# Altium PCB carDoor.PcbDoc
Units mm, origin at the board's own origin, x right, y up, seen from the top; angles counter-clockwise.
Board outline 60 x 40 mm, 2 copper layers (Top Layer, Bottom Layer); 49 components, 30 nets, 140 pads, 62 vias.
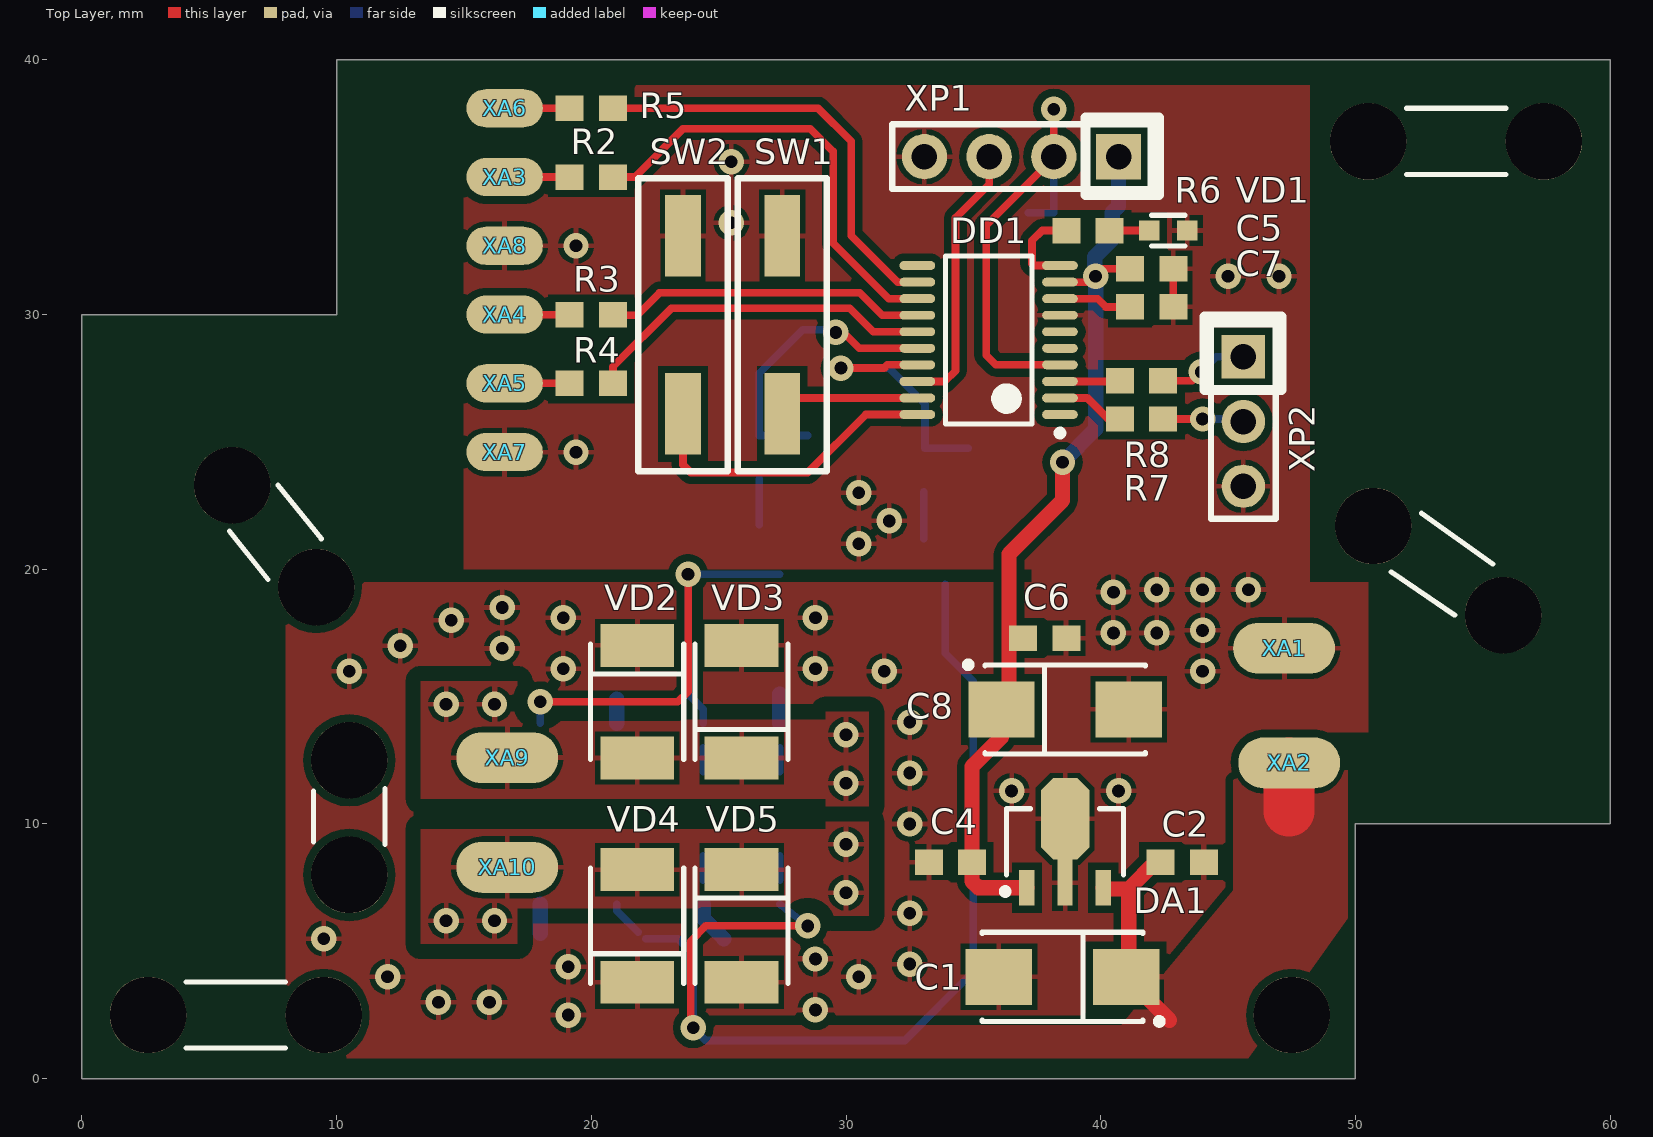
[diagram p0: Top Layer view]
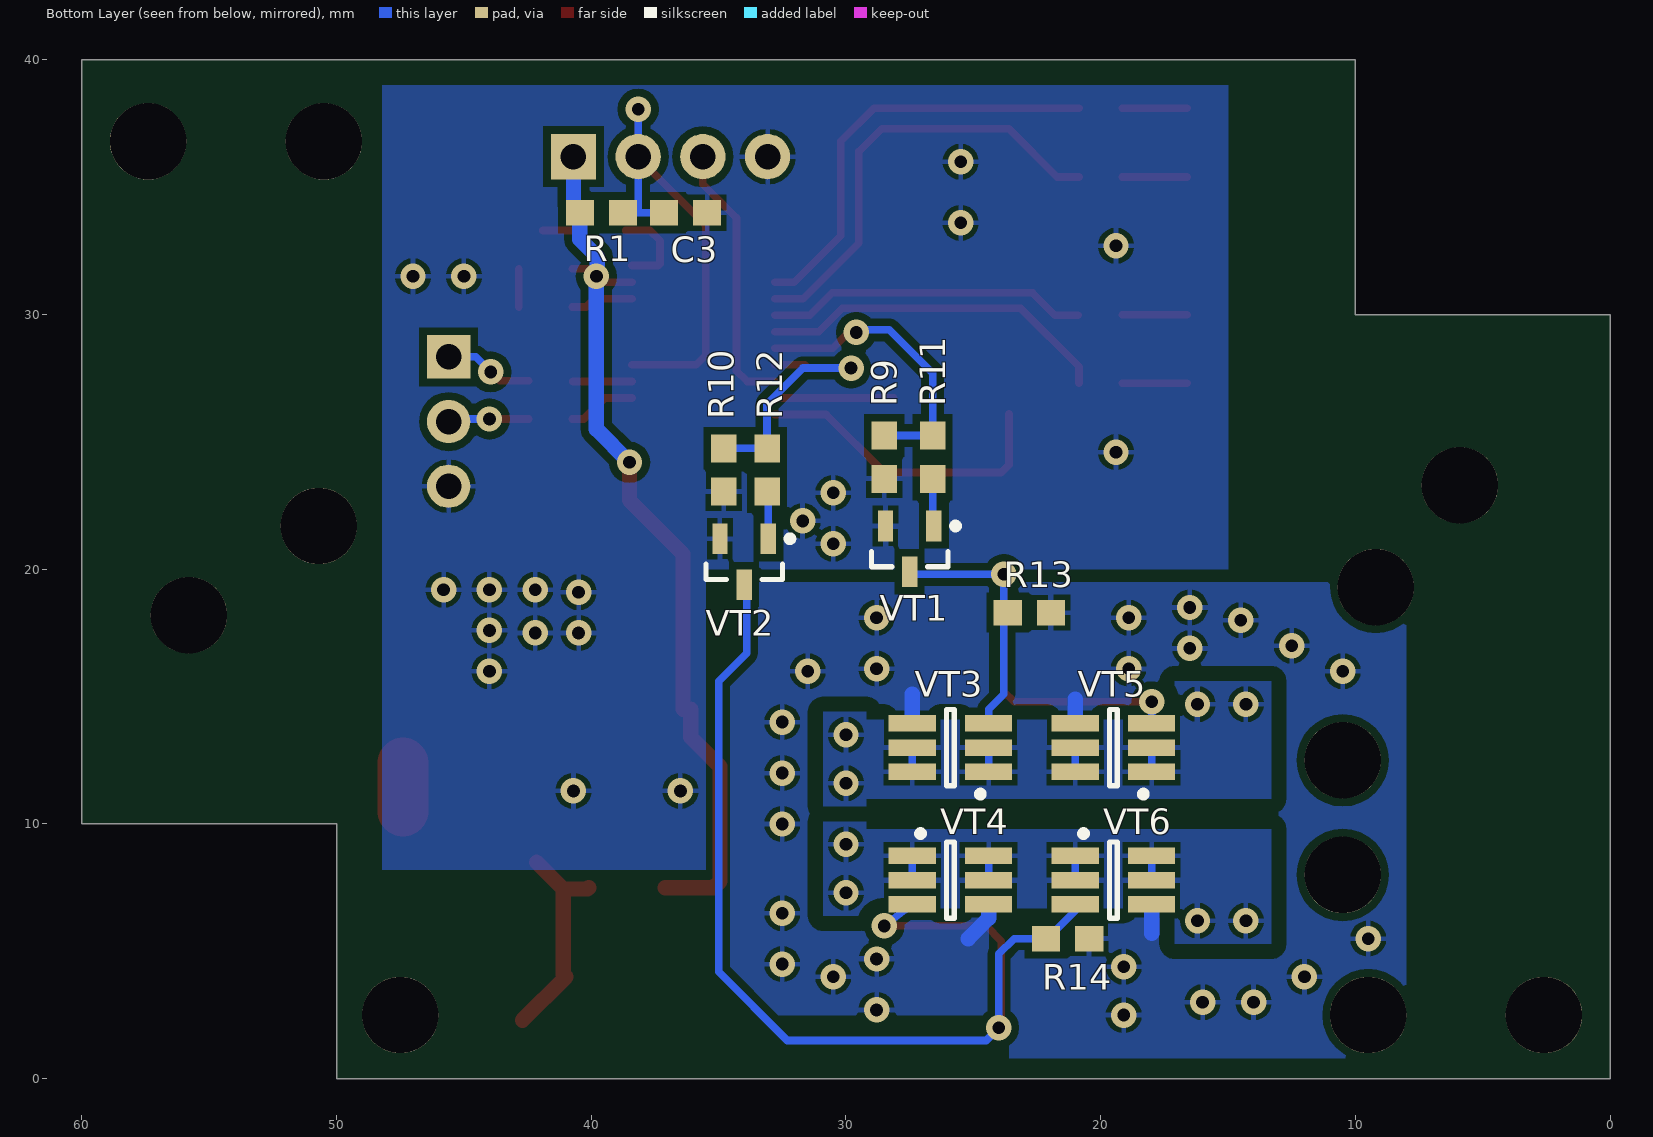
[diagram p1: Bottom Layer view, seen from below]
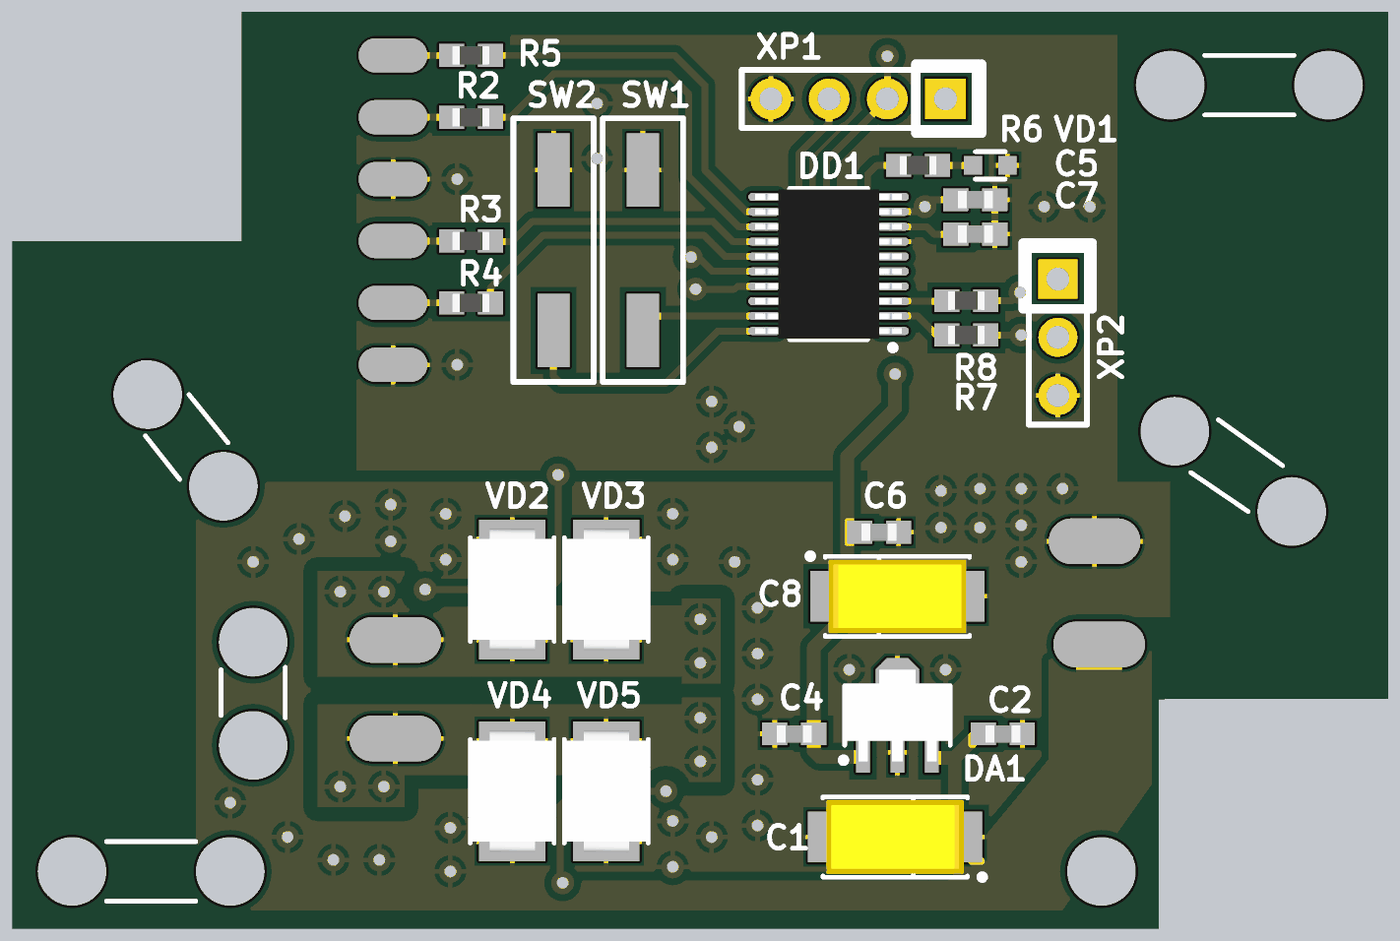
[diagram p2: 3D render of the assembled board from above, using the file's embedded part models]
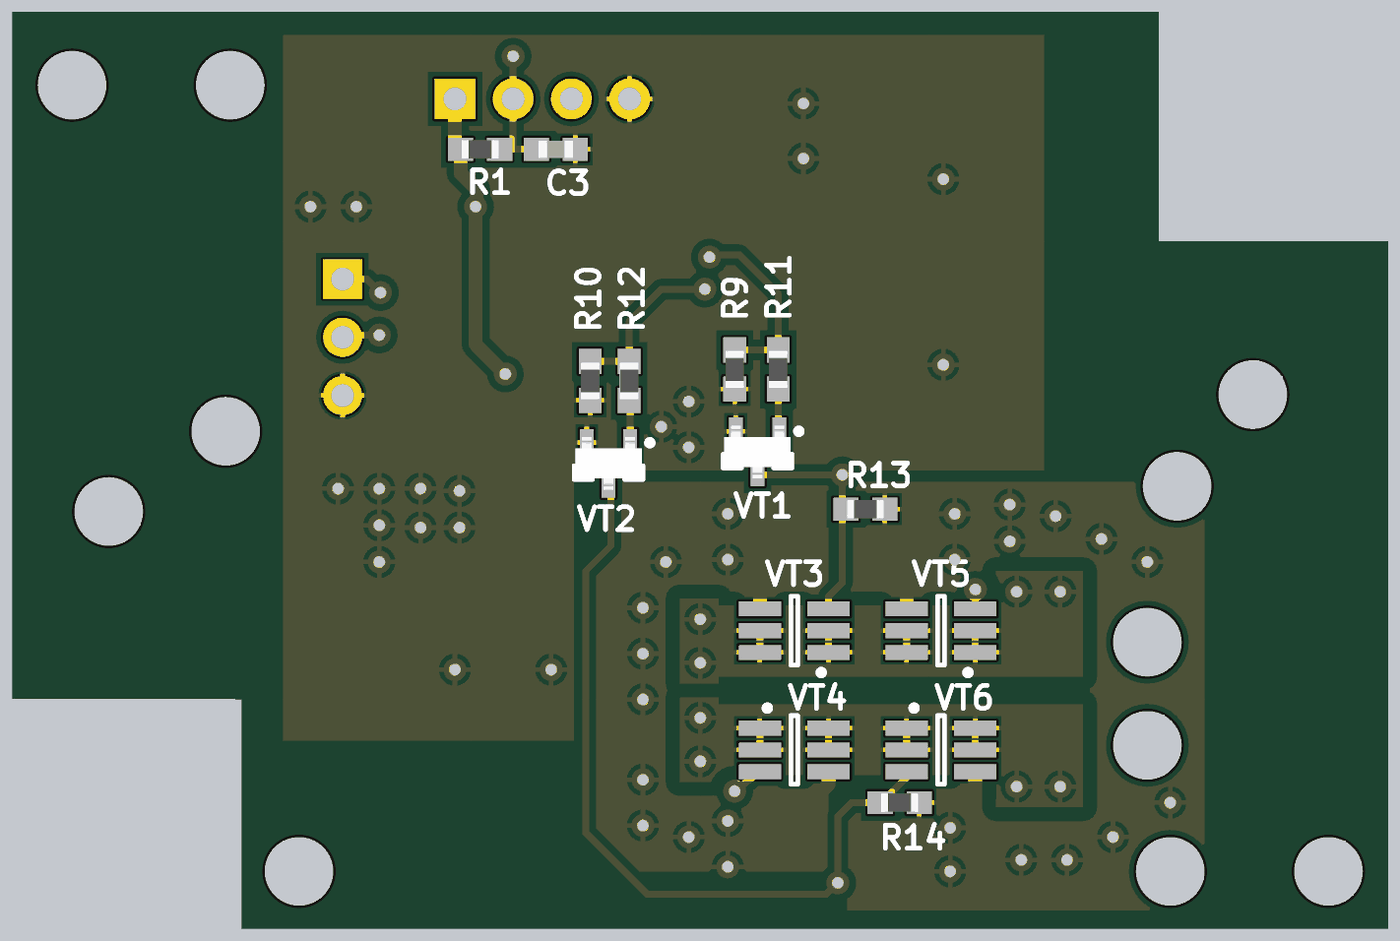
[diagram p3: 3D render of the assembled board from below, using the file's embedded part models]

## Layer stack, top to bottom
Top Solder: solder mask 0.0102, Solder Resist, Dk 3.5
Top Layer: signal copper 0.0356
Dielectric1: dielectric 0.32, FR-4, Dk 4.8
Bottom Layer: signal copper 0.0356
Bottom Solder: solder mask 0.0102, Solder Resist, Dk 3.5

## Board outline
0,0 0,30 10,30 10,40 60,40 60,10 50,10 50,0

## Design rules (kind name [scope] priority, off if disabled: settings)
Clearance Clearance_Motor [(InNet('MOTORA') OR InNet('MOTORB'))] p1: gap=0.6 except(0.2: Track-SMDPad SMDPad-SMDPad SMDPad-Via SMDPad-Fill SMDPad-Poly; 0.5: Track-Track)
Clearance [All] p2: gap=0.3
HoleSize [All] p1: absolutevalues=TRUE maxlimit=25.54 minlimit=0.025 maxpercent=80.000 minpercent=20.000
PlaneConnect [All] p1: planeconnectstyle=Direct reliefexpansion=0.508 reliefentries=4 reliefconductorwidth=0.254 reliefairgap=0.254
PolygonConnect PolygonConnect_to_Via [All] p1: connectstyle=Relief reliefconductorwidth=0.2 reliefentries=4 polygonreliefangle="90 Angle" airgapwidth=0.2
RoutingVias [All] p1: holewidth=0.5 width=1 viastyle="Through Hole" minholewidth=0.4 minwidth=0.9 maxholewidth=5 maxwidth=5
SolderMaskExpansion [All] p1: expansion=0.102
Width [All] p1: maxlimit=4 minlimit=0.3 preferedwidth=0.3
28 further rules are at their usual default settings.

## Components (designator, comment, footprint, x,y, rotation, side; value= is the part's Value field where it differs from the comment)
C1 "10uFx25V" C-CASE 38.5,4 r180 top
C2 "0.1uF" C-1608[0603] 43.2,8.5 r0 top
C3 "0.1uF" C-1608[0603] 36.3,34 r180 bottom
C4 "0.1uF" C-1608[0603] 34.1,8.5 r180 top
C5 "0.1uF" C-1608[0603] 42,31.8 r0 top
C6 "0.1uF" C-1608[0603] 37.8,17.3 r0 top
C7 "1uF" C-1608[0603] 42,30.3 r0 top
C8 "47uFx6V" C-CASE 38.6,14.5 r0 top
DA1 "L78L05ABU" SOT89 38.6,9.3 r90 top
DD1 "STM8S103F3" TSSOP20 35.6,29 r180 top
R1 "10K" R-1608[0603] 39.6,34 r0 bottom
R2 "100" R-1608[0603] 20,35.4 r0 top
R3 "100" R-1608[0603] 20,30 r0 top
R4 "100" R-1608[0603] 20,27.3 r0 top
R5 "100" R-1608[0603] 20,38.1 r0 top
R6 "1K" R-1608[0603] 39.5,33.3 r180 top
R7 "100" R-1608[0603] 41.6,25.9 r180 top
R8 "100" R-1608[0603] 41.6,27.4 r180 top
R9 "10K" R-1608[0603] 28.5,24.4 r270 bottom
R10 "10K" R-1608[0603] 34.8,23.9 r270 bottom
R11 "1K" R-1608[0603] 26.6,24.4 r270 bottom
R12 "1K" R-1608[0603] 33.1,23.9 r270 bottom
R13 "1K" R-1608[0603] 22.8,18.3 r180 bottom
R14 "1K" R-1608[0603] 21.3,5.5 r180 bottom
SW1 "DTSM-32(SWT-10)" DTSM-32(SWT-10) 27.5,29.6 r270 top
SW2 "DTSM-32(SWT-10)" DTSM-32(SWT-10) 23.6,29.6 r270 top
VD1 "GreenLed 0603" LED-0603 43.4,33.3 r180 top
VD2 "SS14" SMB 21.8,14.8 r270 top
VD3 "SS14" SMB 25.9,14.8 r90 top
VD4 "SS14" SMB 21.8,6 r90 top
VD5 "SS14" SMB 25.9,6 r270 top
VT1 "BC817" SOT-23 27.5,20.8 r270 bottom
VT2 "BC817" SOT-23 34,20.3 r270 bottom
VT3 "IRFTS8342" Micro6 25.9,13 r0 bottom
VT4 "IRFTS8342" Micro6 25.9,7.8 r180 bottom
VT5 "IRFTS9342" Micro6 19.5,13 r0 bottom
VT6 "IRFTS9342" Micro6 19.5,7.8 r180 bottom
XA1 "*" TPad-4x2mm 47.2,16.9 r0 top
XA2 "*" TPad-4x2mm 47.4,12.4 r0 top
XA3 "*" TPad-3x1.5mm 16.6,35.4 r0 top
XA4 "*" TPad-3x1.5mm 16.6,30 r180 top
XA5 "*" TPad-3x1.5mm 16.6,27.3 r180 top
XA6 "*" TPad-3x1.5mm 16.6,38.1 r180 top
XA7 "*" TPad-3x1.5mm 16.6,24.6 r180 top
XA8 "*" TPad-3x1.5mm 16.6,32.7 r180 top
XA9 "*" TPad-4x2mm 16.7,12.6 r180 top
XA10 "*" TPad-4x2mm 16.7,8.3 r180 top
XP1 "PLS-4" PLS4 40.7,36.2 r180 top
XP2 "PLS-3" PLS3 45.6,28.34 r270 top

## Footprints (in the part's own frame and the unit in brackets; to place one, negate y for a bottom-side part, rotate by r counter-clockwise, add the part's x,y. Pads: shape width x height; smd on the part's side, far side on the other; paste and mask are expansions set on the pad)
C-1608[0603] [mm]
  rect 1.1x1 smd: 1(-0.85,0) 2(0.85,0)
  body extent -0.76,-0.38 0.76,0.38, height 0.5
C-CASE [mm]
  rect 2.6x2.2 smd: 1(-2.5,0) 2(2.5,0)
  silkscreen extent -3.92,-1.75 3.15,1.87, body extent -3,-1.6 3,1.6, height 2.51
DTSM-32(SWT-10) [mm]
  rect 3.2x1.4 smd: 1(-3.5,0) 2(3.5,0)
  silkscreen extent -5.75,-1.75 5.75,1.75, body extent -4.25,-1.65 4.5,1.65, height 5
LED-0603 [mm]
  rect 0.8x0.8 smd: 1(0,0) 2(1.5,0)
  silkscreen extent 0.1,-0.6 1.4,0.6
Micro6 [mm] "IRLMS1503 footprint"
  rect 1.85x0.65 smd: 1(-1.5,0.95) 2(-1.5,0) 3(-1.5,-0.95) 4(1.5,-0.95) 5(1.5,0) 6(1.5,0.95)
  silkscreen extent -1.3,-1.5 0.15,1.95, body extent -0.87,-1.5 0.88,1.5, height 1.45
PLS3 [mm]
  rect 1.7x1.7 hole 1: 1(0,0)
  round 1.7 hole 1: 2(2.54,0) 3(5.08,0)
  silkscreen extent -1.58,-1.53 6.35,1.5, body extent -1.27,-1.3 6.3,1.3, height 8.54
PLS4 [mil]
  rect 70x70 hole 39.37: 1(0,0)
  round 70 hole 39.37: 2(100,0) 3(200,0) 4(300,0)
  silkscreen extent -62,-60 350,59, body extent -50,-50 350,50, height 336
R-1608[0603] [mm]
  rect 1.1x1 smd: 1(-0.85,0) 2(0.85,0)
  body extent -0.8,-0.4 0.8,0.4, height 0.37
SMB [mil] "http://www.vishay.com/docs/95017/smb.pdf"
  rect 66x114 smd mask+4: 1(-87,0) 2(87,0)
  silkscreen extent -89,-72 89,72, body extent -104,-70 104,70, height 85
SOT89 [mm] "SOT89, 3-Leads, Body 4.5x2.4 mm, Pitch 1.5mm, Lead Span 4.1mm, IPC Medium Density"
  rect 1.4x0.6 smd: 1(-1.8,1.5) 3(-1.8,-1.5)
  rect 1.8x0.6 smd: 2(-1.6,0)
  oct 3.2x1.9 smd: 2(0.9,0)
  silkscreen extent -2.07,-2.3 1.3,2.47, body extent -2,-2.25 2,2.25, height 1.55
SOT-23 [mm] "SOT23, 3-Leads, Body 2.9x1.3mm, Pitch 0.95mm, Lead Span 2.5mm, IPC High Density"
  rect 1.2x0.6 smd: 1(-0.9,0.95) 2(-0.9,-0.95) 3(0.9,0)
  silkscreen extent -1.02,-1.5 0.7,1.92, body extent -1.15,-1.45 1.15,1.45, height 1
TPad-3x1.5mm [mm] "Pad-3x1.5mm"
  oval 3x1.5 smd: 0(0,0)
TPad-4x2mm [mm] "Pad-4x2mm"
  oval 4x2 smd: 0(0,0)
TSSOP20 [mm] "TSOP, 20-Leads, Body 6.5x4.4mm, Pitch 0.65mm, IPC High Density"
  oval 1.4x0.35 smd: 1(-2.8,2.925) 2(-2.8,2.275) 3(-2.8,1.625) 4(-2.8,0.975) 5(-2.8,0.325) 6(-2.8,-0.325) 7(-2.8,-0.975) 8(-2.8,-1.625) 9(-2.8,-2.275) 10(-2.8,-2.925) 11(2.8,-2.925) 12(2.8,-2.275) 13(2.8,-1.625) 14(2.8,-0.975) 15(2.8,-0.325) 16(2.8,0.325) 17(2.8,0.975) 18(2.8,1.625) 19(2.8,2.275) 20(2.8,2.925)
  silkscreen extent -2.93,-3.3 1.7,3.77, body extent -3.2,-3.25 3.2,3.25, height 0.97

## Part data
C1 C8: library part C-CCASE, "C-CCASE"
C2 C3 C4 C5 C6 C7: library part C-0603, "C-0603"
DD1: library part "STM8S103Fx TSSOP20, SO20", "STM8 8-bit microcontroller"
R1 R2 R3 R4 R5 R6 R7 R8 R9 R10 R11 R12 R13 R14: library part R-0603, "R-0603"
VD1: library part L-C191KGCT, "0603 Green Led"
VD2 VD3 VD4 VD5: library part MBRS140T3G, "Surface Mount Schottky Power Rectifier"
VT3 VT4: "HEXFET Power Mosfet N channel"
VT5 VT6: "HEXFET Power MOSFET P channel"
XA1 XA2 XA3 XA4 XA5 XA6 XA7 XA8 XA9 XA10: library part "TPad without via", "pad for soldering"

## Free pads (board coordinates)
  round 3 hole 3 unplated: 0(2.6,2.5) 0(5.9,23.3) 0(9.2,19.3) 0(9.5,2.5) 0(10.5,8) 0(10.5,12.5) 0(47.5,2.5) 0(50.5,36.8) 0(50.7,21.7) 0(55.8,18.2) 0(57.4,36.8)

## Via types
v1: diameter 1, hole 0.5, Top Layer to Bottom Layer, tented both sides, 62 vias

## Nets (pads, with @x,y where several pads share a name; then routed paths per layer and width w, separated by ;. In a path a pad name is that pad's centre, name@x,y a point inside that pad or via, vN(x,y) a via of type N, cw(c..) or ccw(c..) an arc to the next point about the centre after c; other vN are vias at no path point)
+5V: C4.1 C5.1 C6.1 C8.1 DA1.1 DD1.9 R1.2 XP1.1 | length 35.3
  Top Layer w0.3: DD1.9 39.475,31.275 39.7,31.5 v1(39.8,31.5) ; v1@40,31.8 C5.1@40.75,31.8
  Top Layer w0.6: C8.1 36.1,13.411 34.95,12.261 C4.1 34.95,7.75 35.2,7.5 DA1.1 ; C8.1@36.4,14.5 36.4,20.6 38.5,22.7 v1(38.5,24.2)
  Bottom Layer w0.6: v1(38.5,24.2) 39.8,25.5 v1(39.8,31.5) ; v1@39.765,31.465 39.765,32.265 40.45,32.95 R1.2 40.7,34.25 XP1.1
+12V: C1.1 C2.1 DA1.3 R13.2 R14.2 VD2.1 VD4.1 VT5.4 VT6.4 XA2.0 | length 12.3
  Top Layer w0.6: DA1.3 40.15,7.45 41.1,7.45 ; C1.1 42.7,2.3 ; C1.1@41.1,4.1 41.1,7.45 ; C2.1@42.15,8.5 41.1,7.45
  Top Layer w2: 47.4,10.5 XA2.0
  Bottom Layer w0.6: 18,5.7 VT6.4 ; VT5.4 21,14.9
  other v1: 19.1,2.5 14,3 16,3 12,4 19.1,4.4 9.5,5.5 10.5,16 18.9,16.1 16.5,16.9 12.5,17 14.5,18 18.9,18.1 16.5,18.5
CLOSE: DD1.20 SW2.2 | length 12.3
  Top Layer w0.3: SW2.2 23.6,24.1 23.9,23.8 28.5,23.8 30.775,26.075 DD1.20
GND: C1.2 C2.2 C3.2 C4.2 C5.2 C6.2 C7.2 C8.2 DA1.2 DD1.7 R9.2 R10.2 SW1.1 SW2.1 VD1.1 VD3.2 VD5.2 VT1.2 VT2.2 VT3.4 VT4.4 XA1.0 XA7.0 XA8.0 XP1.4 XP2.3 | length 4.3
  Top Layer w0.3: C7.2 C5.2
  Bottom Layer w0.6: VT4.4 24.4,6.3 25.2,5.5 ; VT3.4 27.4,15.1
  other v1: 28.8,2.7 30.5,4 32.5,4.5 28.8,4.7 32.5,6.5 32.5,10 36.5,11.3 40.7,11.3 32.5,12 32.5,14 31.5,16 44,16 28.8,16.1 40.5,17.5 42.2,17.5 44,17.6 28.8,18.1 40.5,19.1 42.2,19.2 44,19.2 45.8,19.2 30.5,21 31.7,21.9 30.5,23 19.4,24.6 45,31.5 47,31.5 19.4,32.7 25.5,33.6 25.5,36
IN1: DD1.13 R2.2 | length 17.6
  Top Layer w0.3: R2.2 21.7,35.4 23.6,37.3 28.6,37.3 29.5,36.4 29.5,32.8 31.675,30.625 DD1.13
IN2: DD1.14 R3.2 | length 12.7
  Top Layer w0.3: R3.2@20.875,29.975 21.8,29.975 22.679,30.854 30.546,30.854 31.425,29.975 DD1.14
IN3: DD1.15 R4.2 | length 13.9
  Top Layer w0.3: R4.2 20.85,27.95 23.15,30.25 30.15,30.25 31.075,29.325 DD1.15
IN4: DD1.12 R5.2 | length 16.9
  Top Layer w0.3: R5.2 28.9,38.1 30.2,36.8 30.2,33.1 32.025,31.275 DD1.12
LED: DD1.10 R6.2 | length 3.5
  Top Layer w0.3: DD1.10 37.375,31.925 37.3,32 37.3,32.9 37.7,33.3 R6.2
MOTORA: VD2.2 VD3.1 VT3.1 VT3.2 VT3.5 VT3.6 VT5.1 VT5.2 VT5.5 VT5.6 XA9.0 | length 3.8
  Bottom Layer w0.3: VT5.1 VT5.2 ; VT5.6 VT5.5 ; VT3.1 VT3.2 ; VT3.6 VT3.5
  other v1: 30,11.6 30,13.5 14.3,14.7 16.2,14.7
MOTORB: VD4.2 VD5.1 VT4.1 VT4.2 VT4.5 VT4.6 VT6.1 VT6.2 VT6.5 VT6.6 XA10.0 | length 3.8
  Bottom Layer w0.3: VT6.5 VT6.6 ; VT6.2 VT6.1 ; VT4.5 VT4.6 ; VT4.2 VT4.1
  other v1: 14.3,6.2 16.2,6.2 30,7.3 30,9.2
N\R\S\T\: C3.1 DD1.4 R1.1 XP1.2 | length 18.9
  Top Layer w0.3: v1(38.16,38.06) XP1.2 38.16,36.16 35.5,33.5 35.5,28.4 35.875,28.025 DD1.4
  Bottom Layer w0.3: C3.1 38.16,34 XP1.2 v1(38.16,38.06)
NetC7_1: C7.1 DD1.8 | length 2.5
  Top Layer w0.3: DD1.8 39.875,30.625 40.2,30.3 C7.1@40.75,30.3
NetDD1_2: DD1.2 R7.2 | length 2.7
  Top Layer w0.3: DD1.2 39.475,26.725 40.3,25.9 R7.2
NetDD1_3: DD1.3 R8.2 | length 2.3
  Top Layer w0.3: DD1.3 R8.2@40.725,27.375
NetR2_1: R2.1 XA3.0 | length 2.5
  Top Layer w0.3: XA3.0 R2.1
NetR3_1: R3.1 XA4.0 | length 2.5
  Top Layer w0.3: XA4.0 R3.1
NetR4_1: R4.1 XA5.0 | length 2.5
  Top Layer w0.3: XA5.0 R4.1
NetR5_1: R5.1 XA6.0 | length 2.5
  Top Layer w0.3: XA6.0 R5.1
NetR6_1: R6.1 VD1.2 | length 1.5
  Top Layer w0.3: R6.1 VD1.2
NetR11_2: R11.2 VT1.1 | length 1.8
  Bottom Layer w0.3: VT1.1@26.6,21.75 R11.2
NetR12_2: R12.2 VT2.1 | length 1.8
  Bottom Layer w0.3: VT2.1 R12.2@33.05,23.05
NetR13_1: R13.1 VT1.3 VT3.3 VT5.3 | length 21.1
  Top Layer w0.3: v1(18,14.8) 23.4,14.8 23.8,15.2 v1(23.8,19.8)
  Bottom Layer w0.3: VT5.3 v1(18,14.8) ; VT3.3 24.4,14.5 23.8,15.1 v1(23.8,19.8) VT1.3@27.4,19.8
NetR14_1: R14.1 VT2.3 VT4.3 VT6.3 | length 44.6
  Top Layer w0.3: v1(24,2) 23.9,2.1 23.9,5.4 24.5,6 v1(28.5,6)
  Bottom Layer w0.3: VT6.3 21,6.6 R14.1@21.85,5.75 ; R14.1 23.4,5.5 24,4.9 v1(24,2) 24.5,1.5 32.3,1.5 35,4.2 35,15.6 33.9,16.7 VT2.3@33.9,19.4 ; VT4.3 27.675,6.637 28.225,6.212 v1(28.5,6) ; v1(28.5,6) 28.5,5.75 v1(28.5,6)
OPEN: DD1.19 SW1.2 | length 4.7
  Top Layer w0.3: SW1.2@28.125,26.725 DD1.19
OUTA: DD1.16 R9.1 R11.1 | length 12.2
  Top Layer w0.3: v1(29.6,29.3) 29.6,29 29.9,29.3 30.525,28.675 DD1.16
  Bottom Layer w0.3: R9.1 R11.1 26.6,27.7 28.3,29.4 29.7,29.4 v1(29.6,29.3)
OUTB: DD1.17 R10.1 R12.1 | length 10.4
  Top Layer w0.3: v1(29.8,27.9) 31.5,27.9 31.625,28.025 DD1.17
  Bottom Layer w0.3: v1(29.8,27.9) 31.7,27.9 33.1,26.5 R12.1 R10.1
RX: R8.1 XP2.1 | length 3.5
  Top Layer w0.3: R8.1 43.6,27.4 v1(43.95,27.75)
  Bottom Layer w0.3: v1(43.95,27.75) 44.54,28.34 XP2.1
SWIM: DD1.18 XP1.3 | length 10.6
  Top Layer w0.3: DD1.18 33.875,27.375 34.3,27.8 34.3,33.8 35.62,35.12 XP1.3
TX: R7.1 XP2.2 | length 3.2
  Top Layer w0.3: R7.1 v1(44,25.9)
  Bottom Layer w0.3: v1(44,25.9) 45.5,25.9 XP2.2
pads on no net: DD1.1 DD1.5 DD1.6 DD1.11

## Polygon pours and split planes (outlines as drawn)
+12V on Top Layer "Top +12 Bridge" (solid, remove dead copper, pour order 23): 8,0.8 8,19.5 23.6,19.5 23.6,11 13.326,11 13.326,9.8 23.6,9.8 23.6,2.1 40.8,2.1 45.2,7.4 45.2,13.6 49.7,13.6 49.7,6.3 45.8,0.8
GND on Top Layer "Top GND Logical" (solid, remove dead copper, pour order 2): 15,39 15,20 37.3,20 37.3,12.1 48.2,12.1 48.2,39
GND on Top Layer "Top GND Bridge" (solid, remove dead copper, pour order 24): 24.4,2.5 45.8,2.5 45.8,13.6 50.5,13.6 50.5,19.5 24.4,19.5
MOTORA on Top Layer "Top Layer-No Net" (solid, remove dead copper, pour order 6): 13.3,11 13.3,15.6 17.1,15.6 17.1,14.1 29.2,14.1 29.2,14.4 30.9,14.4 30.9,10.7 29.2,10.7 29.2,11
MOTORB on Top Layer "Top Layer-No Net" (solid, remove dead copper, pour order 8): 17.1,5.3 13.3,5.3 13.3,9.8 29.2,9.8 29.2,10.1 30.9,10.1 30.9,6.4 29.2,6.4 29.2,6.7 28,6.7 17.1,6.7
GND on Bottom Layer "Bottom GND Logical" (solid, remove dead copper, pour order 10): 15,39 15,20 35.5,20 35.5,8.2 48.2,8.2 48.2,39
+12V on Bottom Layer "Bottom +12 Bridge" (solid, remove dead copper, pour order 21): 8,0.8 8,19.5 23.6,19.5 23.6,11 13.326,11 13.326,9.8 23.6,9.8 23.6,0.8
GND on Bottom Layer "Bottom GND Bridge" (solid, remove dead copper, pour order 22): 24.4,2.5 35,2.5 35,19.5 24.4,19.5
MOTORA on Bottom Layer "Bottom MotorA" (solid, remove dead copper, pour order 16): 17.1,15.6 13.3,15.6 13.3,11 29.2,11 29.2,10.7 30.9,10.7 30.9,14.4 29.2,14.4 29.2,14.1 17.1,14.1
MOTORB on Bottom Layer "Bottom MotorB" (solid, remove dead copper, pour order 18): 13.3,9.8 13.3,5.3 17.1,5.3 17.1,6.7 29.2,6.7 29.2,6.4 30.9,6.4 30.9,10.1 29.2,10.1 29.2,9.8

## Silkscreen, mask and mechanical layers (free items; w line width, h text height)
Top Overlay:
  lines w0.2: 4.1,1.2 8,1.2 ; 4.1,3.8 8,3.8 ; 5.8,21.5 7.3,19.6 ; 7.7,23.3 9.4,21.2 ; 9.1,9.3 9.1,11.3 ; 11.9,9.2 11.9,11.4 ; 51.4,19.9 53.9,18.2 ; 52,35.5 55.9,35.5 ; 52,38.1 55.9,38.1 ; 52.6,22.2 55.4,20.2
Mechanical 1:
  the board outline again, w0.254